# EAGLE board PCB Termometr (EAGLE 9.4.1)
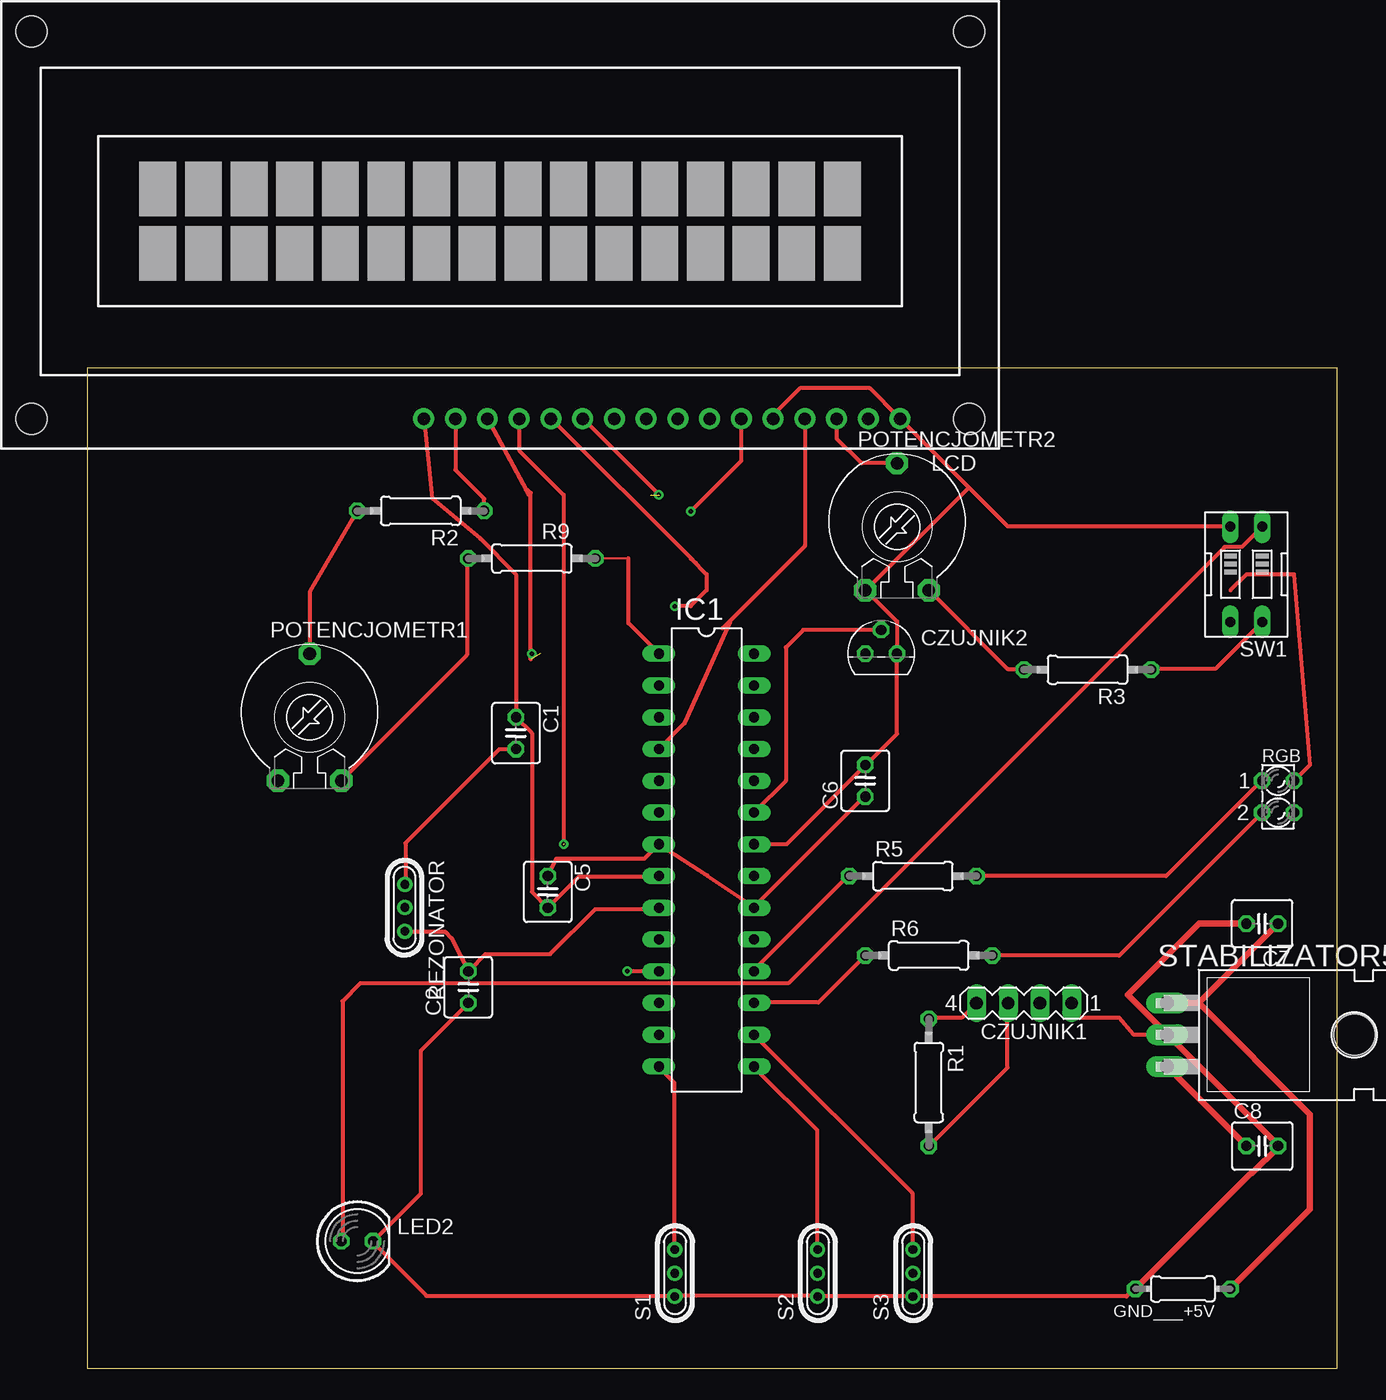
[diagram p0: board, top side]
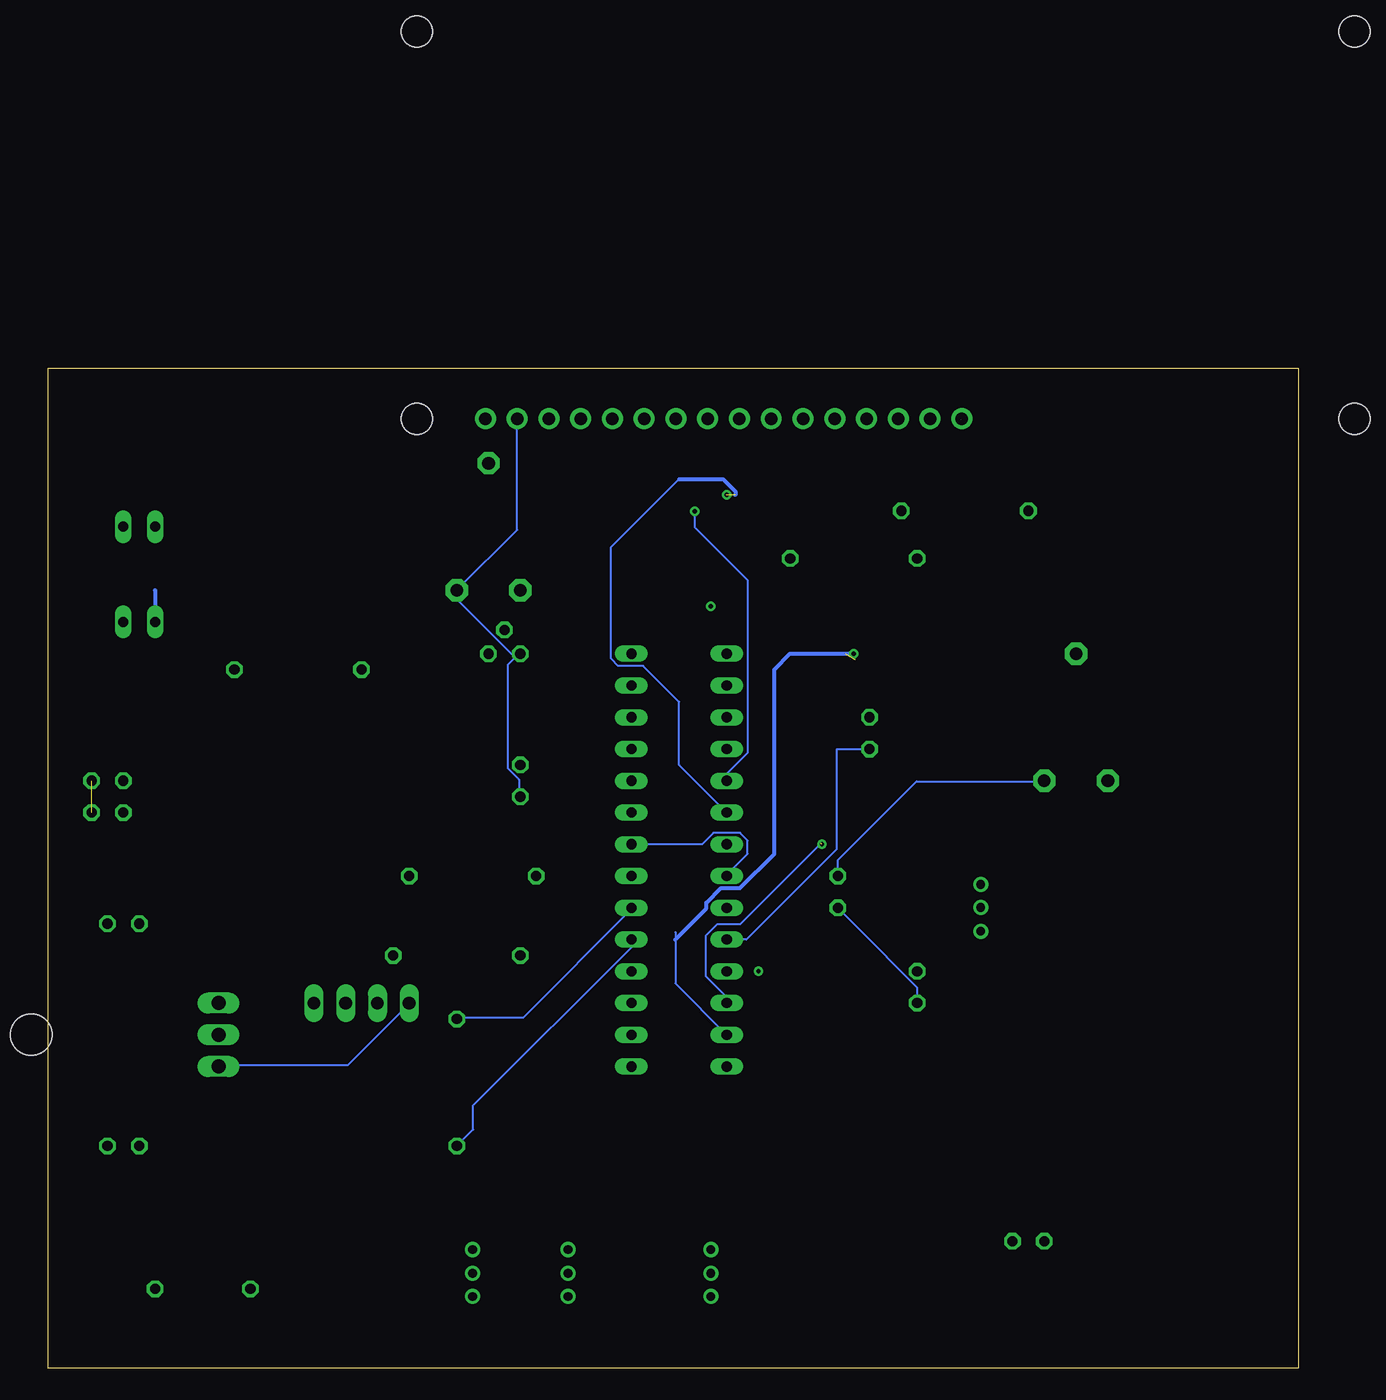
[diagram p1: board, bottom side, seen from below]

Size 100 x 80 mm. Coordinates in mm from the lower left corner, seen from the top.
Outline: 0,0 100,0 100,80 0,80 0,0
Copper layers (1*16): Top 0.035mm / dielectric 1.5mm / Bottom 0.035mm
Design rules "default": minimum track width 6mil, minimum drill 0.35mm, track to track 6mil, track to pad 6mil, pad to pad 6mil, via to via 6mil, smd to smd 6mil, copper to edge 40mil, drill to drill 6mil, minimum pad ring 10mil, minimum via ring 8mil, stop-mask expansion 4mil, vias tented up to drill 0mil, thermal gap 10mil

## Footprints (pad centres in the part's own frame; a part is rotated, then mirrored left to right if it is on the bottom)
C025-040X050 = drill 0.813 octagon: 1 -1.27,0; 2 1.27,0
MA04-1 = drill 1.016 long: 1 -3.81,0; 2 -1.27,0; 3 1.27,0; 4 3.81,0
TO92 = drill 0.813 octagon: 1 1.27,0; 2 0,1.905; 3 -1.27,0
0204/7 = drill 0.813 octagon: 1 -3.81,0; 2 3.81,0
DIL28-3 = drill 0.813 long: 1 -16.51,-3.81; 2 -13.97,-3.81; 3 -11.43,-3.81; 4 -8.89,-3.81; 5 -6.35,-3.81; 6 -3.81,-3.81; 7 -1.27,-3.81; 8 1.27,-3.81; 9 3.81,-3.81; 10 6.35,-3.81; 11 8.89,-3.81; 12 11.43,-3.81; 13 13.97,-3.81; 14 16.51,-3.81; 15 16.51,3.81; 16 13.97,3.81; 17 11.43,3.81; 18 8.89,3.81; 19 6.35,3.81; 20 3.81,3.81; 21 1.27,3.81; 22 -1.27,3.81; 23 -3.81,3.81; 24 -6.35,3.81; 25 -8.89,3.81; 26 -11.43,3.81; 27 -13.97,3.81; 28 -16.51,3.81
TUXGR_16X2_R2 = drill 1 pad 1.676: 1 -32,15.5; 2 -29.46,15.5; 3 -26.92,15.5; 4 -24.38,15.5; 5 -21.84,15.5; 6 -19.3,15.5; 7 -16.76,15.5; 8 -14.22,15.5; 9 -11.68,15.5; 10 -9.14,15.5; 11 -6.6,15.5; 12 -4.06,15.5; 13 -1.52,15.5; 14 1.02,15.5; 15 3.56,15.5; 16 6.1,15.5 | hole 2.5: -37.5,-15.5; 37.5,-15.5; -37.5,15.5; 37.5,15.5
LED5MM = drill 0.813 octagon: A -1.27,0; K 1.27,0
PT-10 = drill 1.016 pad 1.778 octagon: 1 -2.54,-5.08; 2 2.54,-5.08; 3 0,5.08
0207/10 = drill 0.813 octagon: 1 -5.08,0; 2 5.08,0
UM1 = drill 0.7 pad 1.2: 1 -1.875,0; 2 -0.027,0; 3 1.875,0
LZR182 = drill 0.813 octagon: A1 -1.27,1.27; A2 -1.27,-1.27; K1 1.27,1.27; K2 1.27,-1.27
TO220H = drill 1.118 long: 1 -2.54,-10.16; 2 0,-10.16; 3 2.54,-10.16 | hole 3.302: 0,4.826
EDG-02 = drill 0.813 long: 1 -1.27,-3.81; 2 1.27,-3.81; 3 1.27,3.81; 4 -1.27,3.81

## Placement (x,y rotation side)
C1  [C025-040X050]  34.29,50.8 270 top
C2  [C025-040X050]  30.48,30.48 90 top
C5  [C025-040X050]  36.83,38.1 270 top
C6  [C025-040X050]  62.23,46.99 90 top
C7  [C025-040X050]  93.98,35.56 180 top
C8  [C025-040X050]  93.98,17.78 0 top
CZUJNIK1  [MA04-1]  74.93,29.21 180 top
CZUJNIK2  BC238  [TO92]  63.5,57.15 0 top
GND___+5V  [0204/7]  87.63,6.35 180 top
IC1  MEGA8-P  [DIL28-3]  49.53,40.64 270 top
LCD  TUXGR_16X2_R2  [TUXGR_16X2_R2]  33.02,91.44 180 top
LED2  [LED5MM]  21.59,10.16 0 top
POTENCJOMETR1  [PT-10]  17.78,52.07 0 top
POTENCJOMETR2  [PT-10]  64.77,67.31 0 top
R1  [0207/10]  67.31,22.86 270 top
R2  [0207/10]  26.67,68.58 180 top
R3  [0207/10]  80.01,55.88 180 top
R5  [0207/10]  66.04,39.37 0 top
R6  [0207/10]  67.31,33.02 0 top
R9  [0207/10]  35.56,64.77 0 top
REZONATOR  16M20AUM1  [UM1]  25.4,36.83 270 top
RGB  LZR182  [LZR182]  95.25,45.72 0 top
S1  16M20AUM1  [UM1]  46.99,7.62 90 top
S2  16M20AUM1  [UM1]  58.42,7.62 90 top
S3  16M20AUM1  [UM1]  66.04,7.62 90 top
STABILIZATOR5V  7805T  [TO220H]  96.52,26.67 270 top
SW1  [EDG-02]  92.71,63.5 180 top

## Library data of the parts
C1 C2 C5-C8 = rcl; SPICEPREFIX: C
CZUJNIK1 = con-lstb; OC_FARNELL: unknown; OC_NEWARK: unknown
CZUJNIK2 = transistor-neu-to92
GND___+5V R1-R3 R5 R6 R9 = rcl; SPICEPREFIX: R
IC1 = atmel; OC_FARNELL: unknown; OC_NEWARK: unknown
LCD = display-lcd; OC_FARNELL: unknown; OC_NEWARK: unknown
LED2 RGB = led
POTENCJOMETR1 POTENCJOMETR2 = rcl; SPICEMODEL: POT; SPICEPREFIX: X
REZONATOR S1-S3 = crystal; OC_FARNELL: unknown; OC_NEWARK: unknown
STABILIZATOR5V = linear
SW1 = special

## Nets
DIPSWITCH: RGB.K1 RGB.K2 SW1.3
N$1: R3.1 SW1.4
N$2: IC1.18 R5.1
N$3: R5.2 RGB.A1
N$4: CZUJNIK2.2 IC1.23
N$5: CZUJNIK1.3 IC1.19 R1.2
N$6: IC1.16 S3.3
N$7: IC1.15 S2.3
N$8: IC1.14 S1.3
N$9: POTENCJOMETR1.3 R2.2
N$10: LED2.A SW1.1
N$11: LCD.15 R2.1
N$12: IC1.17 R6.1
N$13: LCD.3 POTENCJOMETR2.3
N$14: R6.2 RGB.A2
N$15: C2.2 IC1.9 REZONATOR.3
N$16: LCD.4
N$17: C1.2 IC1.10 REZONATOR.1
N$18: C5.1 C6.1 C8.1 CZUJNIK1.4 CZUJNIK2.3 IC1.7 IC1.20 LCD.2 POTENCJOMETR1.2 POTENCJOMETR2.2 R1.1 R3.2 R9.1 STABILIZATOR5V.3
N$19: C1.1 C2.1 C5.2 C6.2 C7.2 C8.2 CZUJNIK1.1 CZUJNIK2.1 GND___+5V.2 IC1.8 IC1.22 LCD.1 LCD.5 LCD.16 LED2.K POTENCJOMETR2.1 S1.1 S2.1 S3.1 STABILIZATOR5V.2 SW1.2
N$20: IC1.1 R9.2
N$21: IC1.5 LCD.6
N$22: IC1.13 LCD.14
N$23: IC1.12 LCD.13
N$24: LCD.12
N$25: IC1.6 LCD.11
N$26: C7.1 GND___+5V.1 STABILIZATOR5V.1
S$3: IC1.11
S$5: IC1.4

## Tracks (layer width: path | path; a pad name or v marks a point on that pad's centre or on a via)
DIPSWITCH  (2 unrouted)
  Top 0.305: RGB.K1 97.79,48.26 96.52,63.5 92.71,63.5 91.44,62.23
  Bottom 0.305: 91.44,62.23 SW1.3
N$1
  Top 0.152: 85.19,55.93 R3.1
  Top 0.305: 85.19,55.93 90.22,55.93 SW1.4
N$2
  Top 0.152: 53.34,31.85 IC1.18 | 60.86,39.37 R5.1
  Top 0.305: 60.86,39.37 53.34,31.85
N$3
  Top 0.152: 93.88,46.94 RGB.A1
  Top 0.305: R5.2 86.31,39.37 93.88,46.94
N$4
  Top 0.305: IC1.23 55.88,46.99 55.88,57.66 57.28,59.05 CZUJNIK2.2
N$5
  Top 0.152: 73.61,29.11 CZUJNIK1.3 | R1.2 | R1.2 67.26,17.68
  Top 0.305: 73.61,29.11 73.61,24.03 67.26,17.68
  Bottom 0.152: IC1.19 53.34,33.68 65.99,21.03 65.99,19.1 R1.2
N$6
  Top 0.152: 65.99,9.6 S3.3
  Top 0.305: 65.99,9.6 65.99,14.02 IC1.16
N$7
  Top 0.152: 58.37,9.6 S2.3 | 53.34,24.08 IC1.15
  Top 0.305: 58.37,9.6 58.37,19.05 53.34,24.08
N$8
  Top 0.152: 46.94,9.6 S1.3 | 45.72,24.08 IC1.14
  Top 0.305: 46.94,9.6 46.94,22.86 45.72,24.08
N$9
  Top 0.152: 17.83,57.15 POTENCJOMETR1.3
  Top 0.305: 17.83,57.15 17.83,62.18 R2.2
N$10
  Top 0.152: 20.42,10.21 LED2.A
  Top 0.305: 20.42,10.21 20.42,29.36 21.84,30.79 56.08,30.79 90.98,65.68 92.35,65.68 SW1.1
N$11
  Top 0.305: LCD.15 29.46,71.84 31.75,69.56 R2.1
N$12
  Top 0.152: 53.34,29.26 IC1.17
  Top 0.305: 53.34,29.26 58.47,29.26 R6.1
N$13
  Top 0.305: LCD.3 59.94,74.38 61.92,72.39 POTENCJOMETR2.3
N$14
  Top 0.305: R6.2 82.55,33.02 RGB.A2
N$15
  Top 0.152: 25.45,34.9 REZONATOR.3 | 45.72,36.73 IC1.9
  Top 0.305: 25.45,34.9 28.65,34.9 29.16,34.39 C2.2 31.85,33.12 37.03,33.12 40.64,36.73 45.72,36.73
N$16
  Top 0.305: LCD.4 57.4,65.78 50.8,59.18
N$17
  Top 0.152: 25.45,38.71 REZONATOR.1
  Top 0.305: 25.45,38.71 25.45,42.01 32.97,49.53 C1.2
  Bottom 0.152: IC1.10 44.15,34.29 36.93,41.5 36.93,49.53 C1.2
N$18
  Top 0.152: 74.83,55.93 R3.2 | 67.41,28.04 R1.1 | 62.18,45.72 C6.1 | 53.34,36.88 IC1.20
  Top 0.305: 74.83,55.93 73.61,55.93 POTENCJOMETR2.2 | R9.1 30.38,64.67 30.38,57.05 POTENCJOMETR1.2 | 67.41,28.04 69.95,28.04 CZUJNIK1.4 | C5.1 37.52,40.74 44.55,40.74 IC1.7 49.58,39.42 53.34,36.88 62.18,45.72
  Top 0.508: STABILIZATOR5V.3 C8.1
  Bottom 0.152: 62.64,56.84 62.33,57.15 CZUJNIK2.3 62.64,56.84 | 62.64,56.84 63.25,56.24 63.25,48.01 62.33,47.09 62.33,45.72 C6.1 | LCD.2 62.48,75.89 62.48,67.06 POTENCJOMETR2.2 67.21,62.18 67.21,61.42 62.64,56.84 | 53.34,36.88 IC1.20 53.34,36.73 62.03,28.04 67.26,28.04 R1.1 | STABILIZATOR5V.3 86.26,24.23 76.05,24.23 71.17,29.11 CZUJNIK1.4 | C5.1 36.83,40.64 30.53,46.94 20.42,46.94 POTENCJOMETR1.2
N$19  (1 unrouted)
  Top 0.152: 62.28,62.23 62.33,62.18 POTENCJOMETR2.1 | 62.18,48.16 C6.2 62.33,48.31 | 91.44,67.36 SW1.2 | 65.08,75.89 LCD.1 64.92,76.05 | LCD.5 54.86,76.25 | 95.25,17.68 C8.2 95.25,17.83 | 86.41,26.67 STABILIZATOR5V.2 | 47.09,5.79 S1.1 46.94,5.79 | 58.37,5.79 S2.1 58.52,5.79 | 65.99,5.79 S3.1 | 45.72,39.32 IC1.8 | 22.86,10.06 LED2.K
  Top 0.305: 62.33,62.18 64.77,59.74 CZUJNIK2.1 64.77,50.75 62.33,48.31 | IC1.22 55.93,41.91 62.18,48.16 | 91.44,67.36 73.61,67.36 70.51,70.46 | 65.08,75.89 70.51,70.46 | 54.86,76.25 57,78.38 62.59,78.38 64.92,76.05 | 70.51,70.46 62.28,62.23 | 93.19,15.62 93.03,15.56 | CZUJNIK1.1 79.43,28.04 82.55,28.04 83.72,26.67 83.92,26.67 STABILIZATOR5V.2 | 58.37,5.79 47.09,5.79 | 58.52,5.79 65.99,5.79 | LED2.K 26.67,13.97 26.67,25.4 C2.1 | 45.72,39.32 39.32,39.32 C5.2 35.56,38.1 35.56,50.8 C1.1 34.29,63.5 31.45,66.34 27.64,69.55 26.98,75.89 | 46.94,5.79 27.13,5.79 22.86,10.06 | GND___+5V.2 83.76,6.35 83.13,5.75 S3.1
  Top 0.508: 95.25,17.68 93.19,15.62 | 93.03,15.56 GND___+5V.2 | C7.2 88.95,35.56 83.24,29.84 86.41,26.67 95.25,17.83
  Bottom 0.152: C2.1 30.48,30.43 32.92,32.87 32.92,32.92 C5.2 | 26.98,75.89 LCD.16 | IC1.22 47.7,41.91 46.79,42.82 44.65,42.82 44.04,42.22 44.04,41.15 45.72,39.47 IC1.8
N$20
  Top 0.152: 43.28,64.77 R9.2
  Top 0.305: 43.28,64.77 43.28,59.59 IC1.1
N$21  (via drill 0.35)
  Top 0.305: v48.28,68.56 52.32,72.59 LCD.6
  Bottom 0.152: IC1.5 45.72,47.55 44.04,49.23 44.04,63.04 48.28,67.28 v48.28,68.56
N$22  (1 unrouted)
  Top 0.305: 35.46,56.69 35.46,70 35.18,70.28 35.08,70.28 | LCD.14 35.08,70.28 | 35.08,70.28 35.31,69.85
  Bottom 0.152: 49.84,34.9 49.84,34.29 49.84,30.79 IC1.13
  Bottom 0.305: 49.84,34.29 47.35,36.78 47.35,37.23 46.17,38.41 44.66,38.41 41.91,41.16 41.91,55.88 40.64,57.15 36.24,57.15
N$23  (via drill 0.35)  (1 unrouted)
  Top 0.305: LCD.13 34.54,73.41 38.1,69.85 v38.1,41.91
  Bottom 0.152: IC1.12 45.72,29.72 47.4,31.39 47.4,34.59 46.48,35.51 44.65,35.51 38.1,42.06 | 34.59,75.89 LCD.13
N$24  (via drill 0.35)
  Top 0.152: 37.19,75.89 LCD.12
  Top 0.305: 37.19,75.89 48.28,64.8 | 48.67,64.41 48.28,64.8 | 48.28,64.8 48.28,64.75 49.53,63.5 49.53,62.23 48.26,60.96 v46.99,60.96
N$25  (1 unrouted)
  Top 0.152: 39.67,75.95 LCD.11
  Top 0.305: 39.67,75.95 45.77,69.85
  Bottom 0.152: IC1.6 49.53,48.26 49.53,53.3 52.41,56.19 54.4,56.19 54.97,56.75 54.97,65.68 49.53,71.12
  Bottom 0.305: 45.04,69.85 45.04,70.13 46.02,71.12 49.53,71.12
N$26
  Top 0.508: 88.9,29.21 97.79,20.32 97.79,12.7 GND___+5V.1 | STABILIZATOR5V.1 88.9,29.21 | C7.1 88.9,29.21
S$1  (via drill 0.35)
  other vias: 45.72,69.85
S$2  (via drill 0.35)
  Bottom 0.305: 36.83,57.15 v35.56,57.15
S$3
  Top 0.305: IC1.11 43.28,31.75
S$4  (via drill 0.35)
  other vias: 43.18,31.75
S$5
  Top 0.305: 51.41,59.69 47.78,51.59 IC1.4